# Altium PCB Bee Hive Scale Board 3_1.PcbDoc
Units mm, origin at the board's own origin, x right, y up, seen from the top; angles counter-clockwise.
Board outline 42 x 45 mm, 2 copper layers (Top Layer, Bottom Layer), stack 1.671 mm thick; 10 components, 14 nets, 36 pads, 7 vias.
Unrouted connection lines stored in the file: 173.
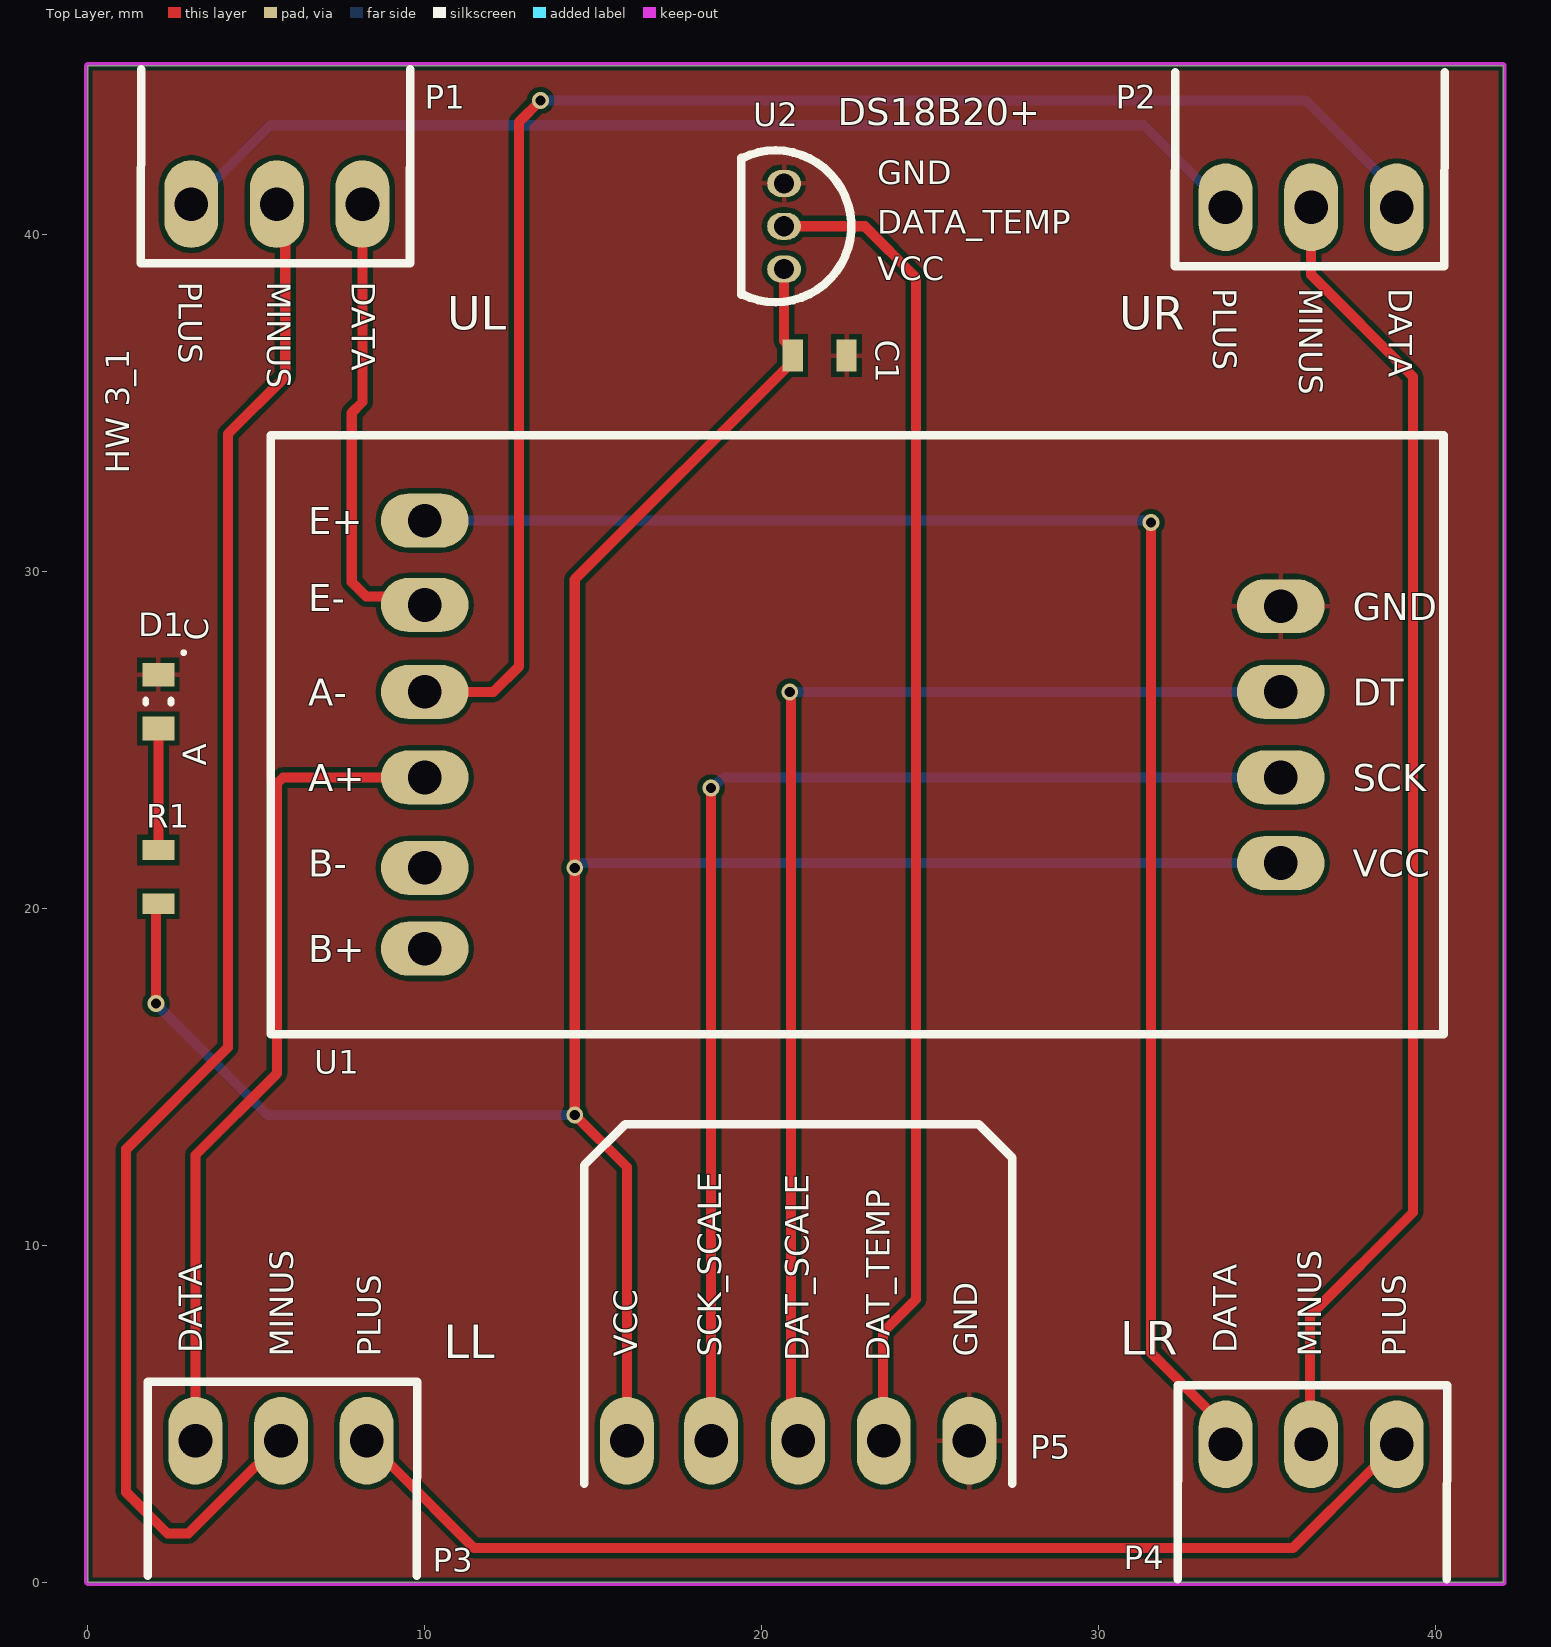
[diagram p0: Top Layer view]
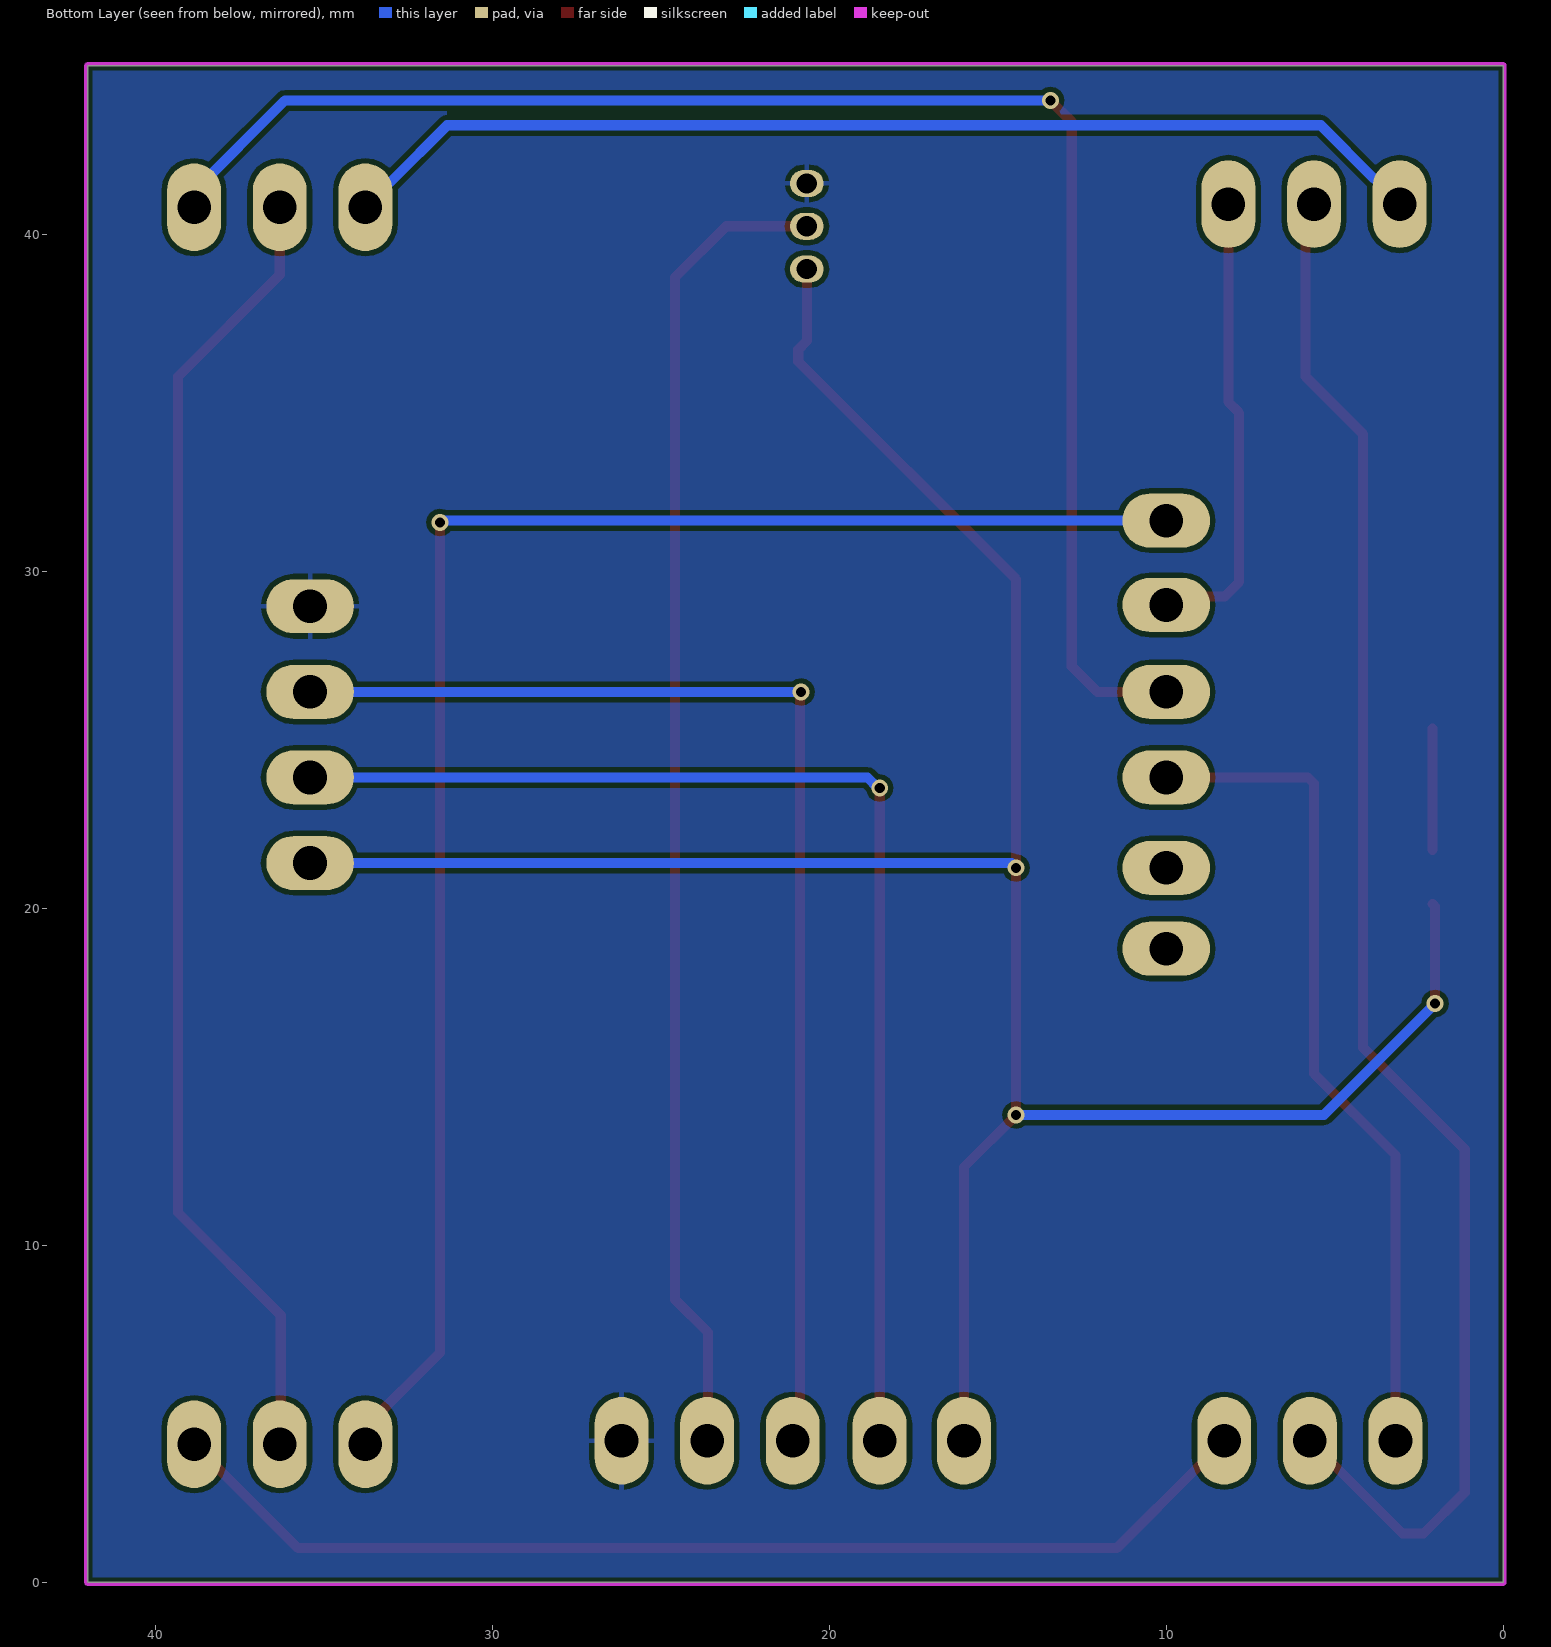
[diagram p1: Bottom Layer view, seen from below]
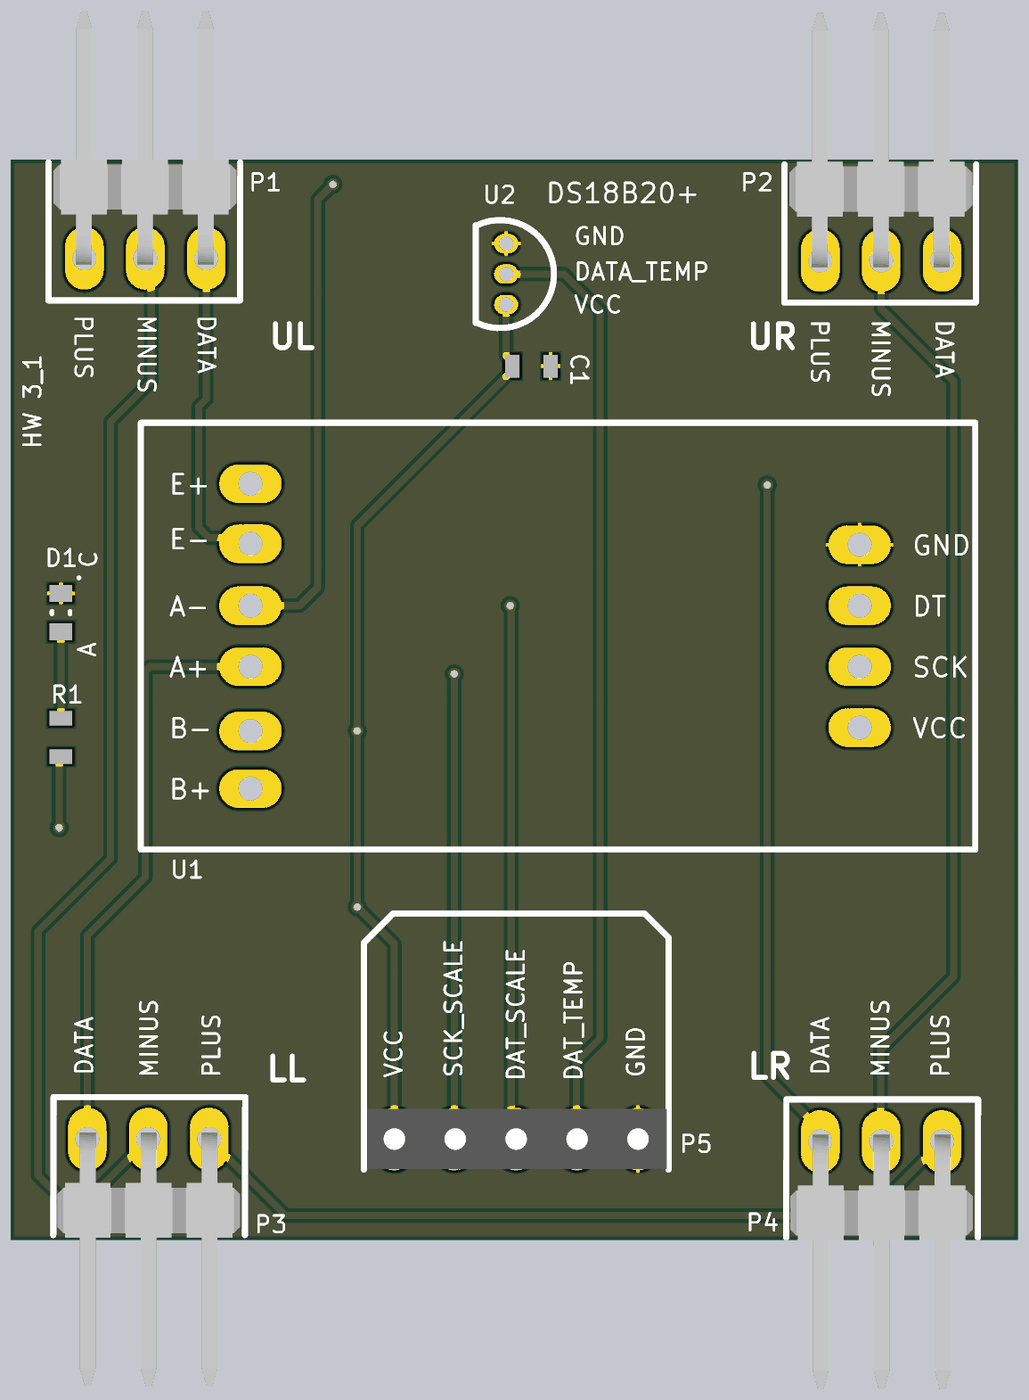
[diagram p2: 3D render of the assembled board from above, using the file's embedded part models]

## Layer stack, top to bottom
Top Solder: solder mask 0.0102, Solder Resist, Dk 3.5
Top Layer: signal copper 0.0356
Dielectric1: core 1.6, FR-4, Dk 4.8
Bottom Layer: signal copper 0.0356
Bottom Solder: solder mask 0.0102, Solder Resist, Dk 3.5

## Board outline
0,0 42,0 42,45 0,45

## Design rules (kind name [scope] priority, off if disabled: settings)
Clearance Clearance_1 [InNamedPolygon('SW_L01_P024')] p1: gap=0.254 ignorepadtopadclearanceinfootprint=FALSE except(0: Arc-Hole Track-Hole SMDPad-Hole THPad-Hole Via-Hole Fill-Hole Poly-Hole Region-Hole Text-Hole)
Clearance [All] p2: gap=0.15 ignorepadtopadclearanceinfootprint=FALSE
ComponentClearance [All] p1: gap=0.001 collisioncheckmode=3 verticalgap=0.254 showdistances=FALSE
FabricationTestPointUsage [All] p1 off: valid=0 allowmultiple=FALSE
FabricationTestpoint [All] p1 off: side=3 testpointundercomponent=TRUE minsize=1.016 maxsize=2.54 preferedsize=1.524 minholesize=0 maxholesize=1.016 preferedholesize=0.813 testpointgrid=0.025 allowsidetop=TRUE allowsidebottom=TRUE usegrid=TRUE gridtolerance=0
HoleSize [All] p1: absolutevalues=TRUE maxlimit=6 minlimit=0.025 maxpercent=80.000 minpercent=20.000
HoleToHoleClearance [All] p1: gap=0 allowstackedmicrovias=TRUE
MinimumSolderMaskSliver [All] p1: minsoldermaskwidth=0
PolygonConnect PolygonConnect_14 [All vs IsNamedPolygon('GND_L01_P041')] p1: connectstyle=Relief reliefconductorwidth=0.15 reliefentries=4 polygonreliefangle="90 Angle" airgapwidth=0.15
PolygonConnect V_BAT_L01_P036 [All vs IsNamedPolygon('V_BAT_L01_P036')] p2: connectstyle=Direct reliefconductorwidth=0.254 reliefentries=4 polygonreliefangle="90 Angle" airgapwidth=0.254
PolygonConnect V_BAT2 [All vs IsNamedPolygon('V_BAT2_L01_P004')] p3: connectstyle=Direct reliefconductorwidth=0.254 reliefentries=4 polygonreliefangle="90 Angle" airgapwidth=0.254
PolygonConnect V_BAT [All vs IsNamedPolygon('V_BAT_L01_P010')] p4: connectstyle=Direct reliefconductorwidth=0.254 reliefentries=4 polygonreliefangle="90 Angle" airgapwidth=0.254
PolygonConnect V_SYS2 [All vs IsNamedPolygon('V_SYS2_L01_P012')] p5: connectstyle=Direct reliefconductorwidth=0.254 reliefentries=4 polygonreliefangle="90 Angle" airgapwidth=0.254
PolygonConnect +3.3b_uBlox [All vs IsNamedPolygon('+3.3V_UBLOX_L01_P014')] p6: connectstyle=Direct reliefconductorwidth=0.254 reliefentries=4 polygonreliefangle="90 Angle" airgapwidth=0.254
PolygonConnect V_LIPO_SYS_L01_P016 [All vs IsNamedPolygon('V_LIPO_SYS_L01_P016')] p7: connectstyle=Direct reliefconductorwidth=0.254 reliefentries=4 polygonreliefangle="90 Angle" airgapwidth=0.254
PolygonConnect V_LIPO_SYS_L01_P020 [All vs IsNamedPolygon('V_LIPO_SYS_L02_P020')] p8: connectstyle=Direct reliefconductorwidth=0.254 reliefentries=4 polygonreliefangle="90 Angle" airgapwidth=0.254
PolygonConnect V_SYS_L02_P024 [All vs IsNamedPolygon('V_SYS_L02_P024')] p9: connectstyle=Direct reliefconductorwidth=0.254 reliefentries=4 polygonreliefangle="90 Angle" airgapwidth=0.254
PolygonConnect VCC_USB_5.0V_L01_P026 [All vs IsNamedPolygon('VCC_USB_5.0V_L01_P026')] p10: connectstyle=Direct reliefconductorwidth=0.254 reliefentries=4 polygonreliefangle="90 Angle" airgapwidth=0.254
PolygonConnect SW [All vs IsNamedPolygon('SW_L01_P008')] p11: connectstyle=Direct reliefconductorwidth=0.254 reliefentries=4 polygonreliefangle="90 Angle" airgapwidth=0.254
PolygonConnect [All] p12: connectstyle=Relief reliefconductorwidth=0.15 reliefentries=4 polygonreliefangle="90 Angle" airgapwidth=0.15
RoutingVias [All] p1: holewidth=0.3 width=0.5 viastyle="Through Hole" minholewidth=0.2 minwidth=0.3 maxholewidth=1.2 maxwidth=2 useviatemplates=TRUE viatemplateguid#1={68F519FB-439D-452A-8ACF-2DE296BA9197} viatemplateguid#2={5ED9683F-E5DF-4E78-BDB1-49E541A8EC46} viatemplateguid#3={FAFF2F81-81C9-46E2-9D3D-D8AEF9417303} viatemplateguid#4={175E6F9D-763D-42D4-A59E-C21ACC7DA2E1} viatemplatename#1=v50h30m0mx0 viatemplatename#2=v50h30m50mx0 viatemplatename#3=v50h20 viatemplatename#4=v50h20mx0
SilkToSilkClearance [All] p1: silktosilkclearance=0.152
SilkToSolderMaskClearance [IsPad] p1: minsilkscreentomaskgap=0.127 clearancetoexposedcopper=TRUE
SolderMaskExpansion [All] p1: expansion=0.102 istentingtop=FALSE
Width [All] p1: maxlimit=5.08 minlimit=0.01 preferedwidth=0.305 minimp=50.000000 maximp=50.000000 favimp=50.000000
22 further rules are at their usual default settings.

## Components (designator, comment, footprint, x,y, rotation, side; value= is the part's Value field where it differs from the comment)
C1 "100nF 0603_1" "CAP 0603" 21.717,36.398 r180 top value=100nF
D1 "LED Diode SMD LOW CURRENT" "LED SMD 0603 FOOTPRINT" 2.099,26.132 r90 top
P1 "3-Pin Right Angle Housing" "3PIN - Connector right angle" 3.075,40.89 r90 top
P2 "3-Pin Right Angle Housing" "3PIN - Connector right angle" 33.76,40.8 r90 top
P3 "3-Pin Right Angle Housing" "3PIN - Connector right angle" 8.279,4.2 r270 top
P4 "3-Pin Right Angle Housing" "3PIN - Connector right angle" 38.84,4.1 r270 top
P5 "comment" 5PIN 16,4.2 r90 top
R1 "1.2k Ohm 0603" "RES 0603 FOOTPRINT" 2.099,20.932 r270 top value=1.2k
U1 "HX711" "HX711 SCALE - long" 10,31.5 r0 top
U2 "DS18B20+" "DS1820 FOOTPRINT" 20.662,41.504 r0 top

## Footprints (in the part's own frame and the unit in brackets; to place one, negate y for a bottom-side part, rotate by r counter-clockwise, add the part's x,y. Pads: shape width x height; smd on the part's side, far side on the other; paste and mask are expansions set on the pad)
"3PIN - Connector right angle" [mm] "3PIN - Connector right angle"
  oval 2.6x1.6 hole 1: 1(0,0) 2(0,-2.54) 3(0,-5.08)
  silkscreen extent -1.75,-6.5 4,1.5, body extent -0.28,-6.33 10.32,1.29, height 2.5
5PIN [mm]
  oval 2.6x1.6 hole 1: 1(0,0) 2(0,-2.5) 3(0,-5.08) 4(0,-7.62) 5(0,-10.16)
  silkscreen extent -1.27,-11.43 1.27,1.27, body extent -1.25,-11.37 1.25,1.13, height 8
"CAP 0603" [mm] "CAP 0603"
  rect 0.6x0.95 smd: 1(-0.8,0) 2(0.8,0)
  body extent -0.8,-0.4 0.8,0.4, height 0.8
"DS1820 FOOTPRINT" [mm] "DS1820 Footprint"
  oval 1x0.8 hole 0.6: 1(0,0) 2(0,-1.27) 3(0,-2.54)
  silkscreen extent -1.27,-3.52 1.99,0.98
"HX711 SCALE - long" [mm] "HX711 SCALE - long"
  oval 2.6x1.6 hole 1: 1(0,0) 2(0,-2.5) 3(0,-5.08) 4(0,-7.62) 5(0,-10.3) 6(0,-12.7) 7(25.4,-2.54) 8(25.4,-5.08) 9(25.4,-7.62) 10(25.4,-10.16)
  silkscreen extent -4.57,-15.24 30.23,2.54
"LED SMD 0603 FOOTPRINT" [mm] "Chip Diode, 2-Leads, Body 1.60x0.80mm, IPC Medium Density"
  rect 0.7x0.95 smd: 1(-0.8,0) 2(0.8,0)
  silkscreen extent -0.05,-0.8 1.5,0.38, body extent -0.8,-0.4 0.8,0.4, height 0.35
"RES 0603 FOOTPRINT" [mm] "RES 0603 FOOTPRINT"
  rect 0.6x0.95 smd: 1(-0.8,0) 2(0.8,0)
  body extent -0.8,-0.4 0.8,0.4, height 0.8

## Part data
C1: "C CERAMIC SMD", Bezeichnung="C SMD", Haendler=Mouser, Haendler Nr=603-CC0603JPX79BB104, Hersteller=Yageo, Hersteller Nr=CC0603JPX7R9BB104, housing/footprint=0603, Preis (CHF)=0.15, Umax=50V
D1: library part "LED Diode SMD - GREEN - 0603 - 2mA_1", "APT1608LZGCK", COLOR=GREEN, Forward Voltage=2.65, Haendler=MOUSER, Haendler Nr=604-APT1608LZGCK, Hersteller=Knightbright, Hersteller Nr=APT1608LZGCK, If=2mA, link=http://ch.farnell.com/kingbright/kpt-1608lvzgck/led-gr-n-50mcd-525nm-smd/dp/2610409, Preis (CHF)=0.321
P1 P2 P3 P4: library part "3-Pin Right Angle", "3-Pin", ComponentLink1Description=Mouser, ComponentLink1URL=https://www.mouser.ch/ProductDetail/TE-Connectivity/640453-2?qs=sGAEpiMZZMs%252bGHln7q6pm5E1Eb6qwPl2KIU5TYv3tVY%3d, Haendler=Mouser, Haendler Nr=538-22-28-8034, Hersteller=molex, Hersteller Nr=22-28-8034, Preis (CHF)=0.32
P5: library part 5-Pin, "5-Pin", Haendler=MOUSER, Haendler Nr=855-M20-9990546, Hersteller=HARWIN, Hersteller Nr=M20-9990546, Preis (CHF)=0.14
R1: "R SMD", Bezeichnung="R SMD", Haendler=Mouser, Haendler Nr=71-RCS06031K20FKEA, Hersteller Nr=RCS06031K20FKEA, housing/footprint=0603, Preis (CHF)=0.01
U1: library part "HX711 XFW Alibaba Board", "HX711 XFW Alibaba Board", Haendler=Alibaba, Haendler Nr="HX711 XFW", Preis (CHF)=1
U2: library part DS18B20, "Temperature Sensor, 12 Bit, OneWire, 3-pin TO-92", Haendler=Mouser, Haendler 2=Distrelec, Haendler 2 Nr=173-77-559, Haendler Nr=700-DS18B20+

## Via types
v1: diameter 0.5, hole 0.3, Top Layer to Bottom Layer, tented both sides, 7 vias

## Nets (pads, with @x,y where several pads share a name; then routed paths per layer and width w, separated by ;. In a path a pad name is that pad's centre, name@x,y a point inside that pad or via, vN(x,y) a via of type N, cw(c..) or ccw(c..) an arc to the next point about the centre after c; other vN are vias at no path point)
DATA_LL: P3.3 U1.4 | length 25
  Top Layer w0.3: P3.3 3.199,12.677 5.615,15.093 5.615,23.7 5.795,23.88 U1.4
DATA_LR: P4.3 U1.1 | length 49.8
  Top Layer w0.3: v1(31.547,31.445) 31.547,6.813 33.76,4.6 P4.3
  Bottom Layer w0.3: U1.1 31.492,31.5 v1(31.547,31.445)
DATA_SCALE: P5.3 U1.8 | length 36.9
  Top Layer w0.3: v1(20.832,26.42) 20.87,26.382 20.87,4.41 P5.3
  Bottom Layer w0.3: v1(20.832,26.42) U1.8
DATA_TEMP: P5.4 U2.2 | length 39.5
  Top Layer w0.3: U2.2 23.056,40.234 24.578,38.711 24.578,8.398 23.597,7.417 23.597,4.223 P5.4
DATA_UL: P1.3 U1.2 | length 13.8
  Top Layer w0.3: P1.3 8.155,35.018 7.835,34.698 7.835,29.678 8.264,29.249 9.751,29.249 U1.2
DATA_UR: P2.3 U1.3 | length 47.2
  Top Layer w0.3: U1.3 12.044,26.42 12.802,27.178 12.802,43.332 v1(13.437,43.967)
  Bottom Layer w0.3: v1(13.437,43.967) 36.148,43.967 38.84,41.275 P2.3
GND: C1.1 D1.2 P5.5 U1.7 U2.1
MINUS_LL: P1.2 P3.2 | length 46.6
  Top Layer w0.3: P1.2 5.863,40.642 5.863,35.773 4.166,34.076 4.166,15.875 1.143,12.852 1.143,2.674 2.369,1.448 2.987,1.448 4.99,3.451 5.139,3.451 5.739,4.052 P3.2
MINUS_LR: P2.2 P4.2 | length 39.2
  Top Layer w0.3: P4.2 36.271,4.129 36.271,7.925 39.319,10.973 39.319,35.773 36.3,38.792 P2.2
NetD1_1: D1.1 R1.1 | length 3.6
  Top Layer w0.3: R1.1 D1.1
PLUS_LL: P3.1 P4.1 | length 33.3
  Top Layer w0.3: P3.1 8.279,4.052 8.88,3.451 9.028,3.451 11.463,1.016 35.756,1.016 38.091,3.351 38.239,3.351 38.84,3.952 P4.1
PLUS_UL: P1.1 P2.1 | length 32.8
  Bottom Layer w0.3: P1.1 3.075,41.038 3.676,41.639 3.824,41.639 5.414,43.229 31.331,43.229 33.011,41.549 33.159,41.549 33.76,40.948 P2.1
SCK_SCALE: P5.2 U1.9 | length 36.4
  Top Layer w0.3: P5.2 v1(18.5,23.573)
  Bottom Layer w0.3: v1(18.5,23.573) 18.554,23.573 18.861,23.88 U1.9
"VCC 5V": C1.2 P5.1 R1.2 U1.10 U2.3 | length 76
  Top Layer w0.3: v1(2.024,17.17) 2.024,20.057 R1.2 ; P5.1 16,12.321 v1(14.453,13.868) v1(14.453,21.2) 14.453,29.759 20.917,36.223 C1.2 20.917,36.573 20.662,36.828 U2.3
  Bottom Layer w0.3: v1(2.024,17.17) 5.326,13.868 v1(14.453,13.868) ; v1(14.453,21.2) 14.593,21.34 U1.10
pads on no net: U1.5 U1.6

## Polygon pours and split planes (outlines as drawn)
GND on Top Layer "GND_L01_P000" (solid, pour order 0): 0,0 42,0 42,45 0,45
GND on Bottom Layer "GND_L02_P001" (solid, pour order 1): 0,0 42,0 42,45 0,45

## Keep-outs
Keep-Out Layer:
  lines w0.1: -0.05,0 ccw(c0,0) 0,-0.05 ; -0.05,0 ccw(c0,0) 0,-0.05 ; -0.05,0 -0.05,45 ; -0.05,45 cw(c0,45) 0,45.05 ; -0.05,45 cw(c0,45) 0,45.05 ; 0,-0.05 42,-0.05 ; 0,45.05 42,45.05 ; 42,-0.05 ccw(c42,0) 42.05,0 ; 42,-0.05 ccw(c42,0) 42.05,0 ; 42,45.05 cw(c42,45) 42.05,45 ; 42,45.05 cw(c42,45) 42.05,45 ; 42.05,0 42.05,45

## Silkscreen, mask and mechanical layers (free items; w line width, h text height)
Top Overlay:
  lines w0.254: 14.73,5.47 14.73,12.376 15.948,13.594 26.436,13.594 27.43,12.6 27.43,5.47
  text "DS18B20+" at 22.26,43.229 h0.8
  text "UL" at 10.673,37.157 h1
  text "UR" at 30.604,37.157 h1
  text "HW 3_1" at 1.242,32.891 h0.7 r90
  text "LR" at 30.629,6.76 h1
  text "LL" at 10.563,6.652 h1

## Text inside footprints (layer, text, board x,y; h text height)
D1: Top Overlay "C" at 3.574,27.932 h0.7 r90; Top Overlay "A" at 3.521,24.227 h0.7 r90
P1: Top Overlay "PLUS" at 2.704,38.59 h0.7 r270; Top Overlay "MINUS" at 5.335,38.59 h0.7 r270; Top Overlay "DATA" at 7.835,38.59 h0.7 r270
P2: Top Overlay "PLUS" at 33.4,38.4 h0.7 r270; Top Overlay "MINUS" at 35.944,38.4 h0.7 r270; Top Overlay "DATA" at 38.6,38.4 h0.7 r270
P3: Top Overlay "PLUS" at 8.7,6.7 h0.7 r90; Top Overlay "MINUS" at 6.1,6.7 h0.7 r90; Top Overlay "DATA" at 3.4,6.8 h0.7 r90
P4: Top Overlay "PLUS" at 39.1,6.7 h0.7 r90; Top Overlay "MINUS" at 36.6,6.7 h0.7 r90; Top Overlay "DATA" at 34.1,6.8 h0.7 r90
P5: Top Overlay "GND" at 26.4,6.7 h0.7 r90; Top Overlay "DAT_TEMP" at 23.8,6.56 h0.7 r90; Top Overlay "VCC" at 16.3,6.7 h0.7 r90; Top Overlay "SCK_SCALE" at 18.8,6.7 h0.7 r90; Top Overlay "DAT_SCALE" at 21.4,6.56 h0.7 r90
U1: Top Overlay "E+" at 6.544,31.092 h0.8; Top Overlay "E-" at 6.544,28.806 h0.8; Top Overlay "A-" at 6.544,26.012 h0.8; Top Overlay "A+" at 6.544,23.472 h0.8; Top Overlay "B-" at 6.544,20.932 h0.8; Top Overlay "B+" at 6.544,18.392 h0.8; Top Overlay "GND" at 37.532,28.552 h0.8; Top Overlay "DT" at 37.532,26.012 h0.8; Top Overlay "SCK" at 37.532,23.472 h0.8; Top Overlay "VCC" at 37.532,20.932 h0.8
U2: Top Overlay "GND" at 23.43,41.482 h0.7; Top Overlay "DATA_TEMP" at 23.43,40.005 h0.7; Top Overlay "VCC" at 23.43,38.629 h0.7